# Altium PCB FingMiddle.PcbDoc
Units mil, origin at the board's own origin, x right, y up, seen from the top; angles counter-clockwise.
Board outline 680 x 680 mil, 2 copper layers (Top Layer, Bottom Layer); 7 components, 4 nets, 24 pads, 2 vias.
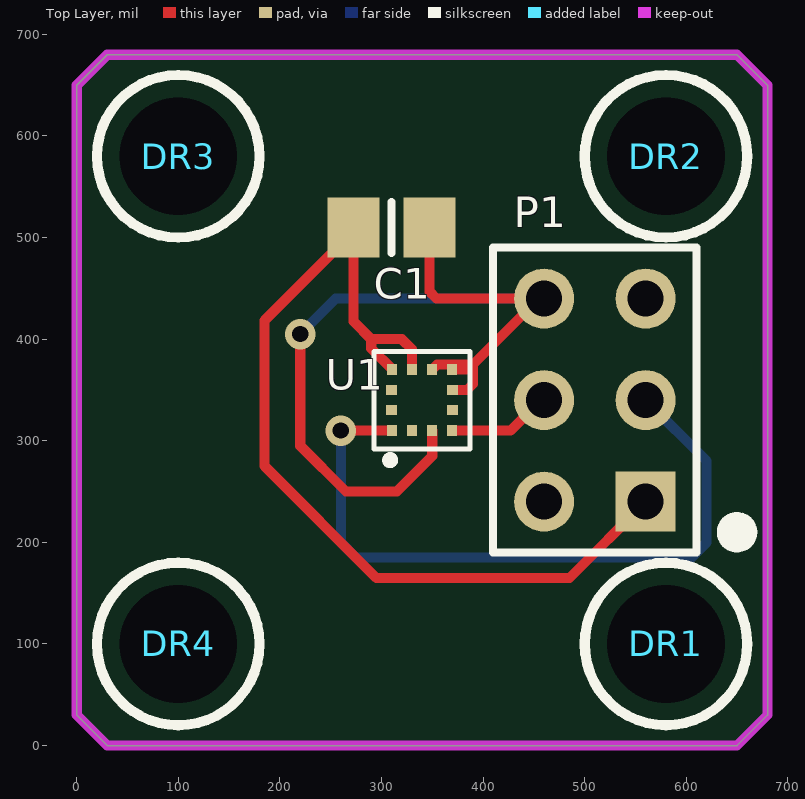
[diagram p0: Top Layer view]
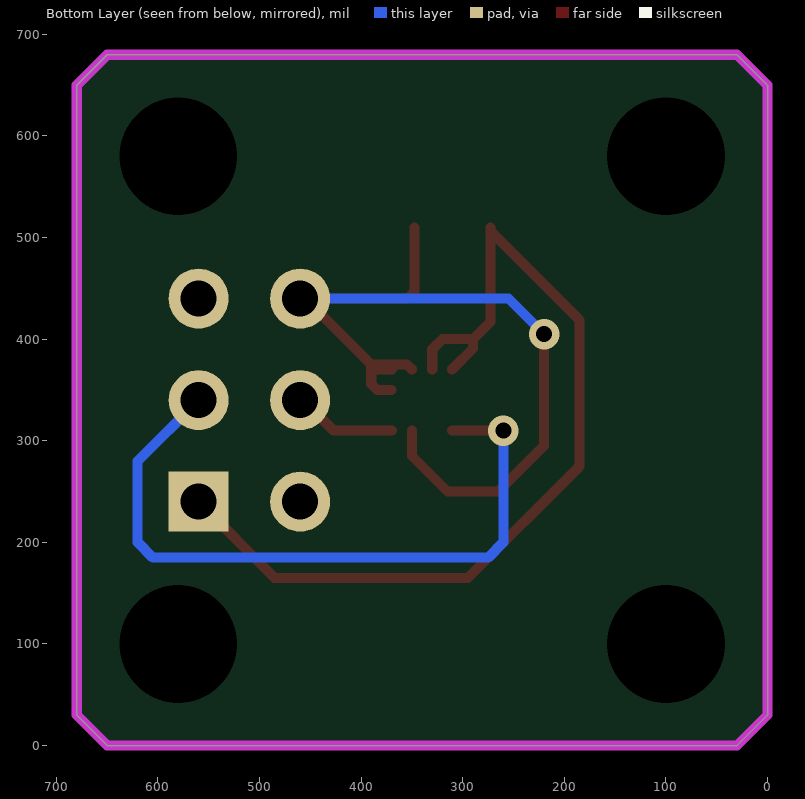
[diagram p1: Bottom Layer view, seen from below]

## Layer stack, top to bottom
Top Solder: solder mask 0.4, Solder Resist, Dk 3.5
Top Layer: signal copper 1.4
Dielectric 1: dielectric 12.6, FR-4, Dk 4.8
Bottom Layer: signal copper 1.4
Bottom Solder: solder mask 0.4, Solder Resist, Dk 3.5

## Board outline
30,0 0,30 0,650 30,680 650,680 680,650 680,30 650,0

## Design rules (kind name [scope] priority, off if disabled: settings)
Clearance "Clearance~Sunstone Circuits" [All] p1: gap=6 ignorepadtopadclearanceinfootprint=FALSE except(0: Arc-Hole Track-Hole SMDPad-Hole THPad-Hole Via-Hole Fill-Hole Poly-Hole Region-Hole Text-Hole) // Sunstone Circuits Minimum Clearance Rule (Double Sided)
HoleSize "HoleSize~Sunstone Circuits" [All] p1: absolutevalues=TRUE maxlimit=251 minlimit=16 maxpercent=80.000 minpercent=20.000 // SSC Hole Size Rule For Single Sided & Double Sided Designs.
HoleSize Testpoint [All] p2: absolutevalues=TRUE maxlimit=100 minlimit=1 maxpercent=80.000 minpercent=20.000
HoleSize TestPointUsage [All] p3: absolutevalues=TRUE maxlimit=100 minlimit=1 maxpercent=80.000 minpercent=20.000
MinimumAnnularRing "MinimumAnnularRing~Sunstone Circuits" [All] p1: minimumring=7 // Sunstone Circuits Minimum Annular Ring (Double Sided)
MinimumSolderMaskSliver [All] p1: minsoldermaskwidth=2
PlaneClearance "PlaneClearance~Sunstone Circuits" [All] p1: clearance=12 // Sunstone Circuits Power Plane Clearance Rule (Double Sided)
PlaneConnect "PlaneConnect~Sunstone Circuits" [All] p1: planeconnectstyle=Relief reliefexpansion=10 reliefentries=4 reliefconductorwidth=8 reliefairgap=10 // Sunstone Circuits Power Plane Connect Rule (Double Sided)
PolygonConnect "PolygonConnect~Sunstone Circuits" [All] p1: connectstyle=Relief reliefconductorwidth=8 reliefentries=4 polygonreliefangle="90 Angle" airgapwidth=10 // Sunstone Circuits Polygon Connect Style (Double Sided)
RoutingVias "RoutingVias~Sunstone Circuits" [All] p1: holewidth=16 width=30 viastyle="Through Hole" minholewidth=16 minwidth=30 maxholewidth=20 maxwidth=40 // Sunstone Circuits Routing Vias Rule (Double Sided)
ShortCircuit "ShortCircuit~Sunstone Circuits" [All] p1: allowed=FALSE // Sunstone Circuits Short Circuit Rule~Do Not Allow (Double Sided)
SilkToSilkClearance [All] p1: silktosilkclearance=1
SilkToSolderMaskClearance [IsPad] p1: minsilkscreentomaskgap=3 clearancetoexposedcopper=TRUE
SolderMaskExpansion "SolderMaskExpansion~Sunstone Circuits" [All] p1: expansion=3 // Sunstone Circuits Solder Mask Expansion Rule (Double Sided)
ViasUnderSMD "ViasUnderSMD~Sunstone Circuits" [All] p1: allowed=FALSE // Sunstone Circuits Vias Under SMD~Do Not Allow (Double Sided)
Width "Width~Sunstone Circuits" [All] p1: maxlimit=100 minlimit=6 preferedwidth=10 // Sunstone Circuits Minimum Width Rule (Double Sided)
23 further rules are at their usual default settings.

## Components (designator, comment, footprint, x,y, rotation, side; value= is the part's Value field where it differs from the comment)
C1 ".1uF" 0805 310,510 r180 top
DR1 "4-40 DRILL HOLE" "4_40 DRILL HOLE" 580,100 r0 top
DR2 "4-40 DRILL HOLE" "4_40 DRILL HOLE" 580,580 r0 top
DR3 "4-40 DRILL HOLE" "4_40 DRILL HOLE" 100,580 r0 top
DR4 "4-40 DRILL HOLE" "4_40 DRILL HOLE" 100,100 r0 top
P1 "90131-0123" HDR2X3 560,240 r90 top
U1 "KX003-1077" *XDCR_KX003-1077 340,340 r90 top

## Footprints (in the part's own frame and the unit in brackets; to place one, negate y for a bottom-side part, rotate by r counter-clockwise, add the part's x,y. Pads: shape width x height; smd on the part's side, far side on the other; paste and mask are expansions set on the pad)
"4_40 DRILL HOLE" [mil]
  round 100 hole 116: 1(0,0)
  silkscreen extent -80,-80 80,80
0805 [mm] "Chip Capacitor; Body 2.0 x 1.2 mm (LxW typ)"
  rect 1.3x1.5 smd: 1(-0.95,0) 2(0.95,0)
  silkscreen extent 0,-0.64 0,0.64, body extent -1,-0.6 1,0.6, height 1.5
*XDCR_KX003-1077 [mm]
  rect 0.275x0.25 smd: 1(-0.763,0.75) 2(-0.763,0.25) 3(-0.763,-0.25) 4(-0.763,-0.75) 7(0.763,-0.75) 8(0.763,-0.25) 9(0.763,0.25) 10(0.763,0.75)
  rect 0.25x0.275 smd: 5(-0.25,-0.763) 6(0.25,-0.763) 11(0.25,0.763) 12(-0.25,0.763)
  silkscreen extent -1.6,-1.2 1.22,1.2
HDR2X3 [mm] "Connector; Header; 3x2 Position"
  rect 1.5x1.5 hole 0.9: 1(0,0)
  round 1.5 hole 0.9: 2(0,2.54) 3(2.54,0) 4(2.54,2.54) 5(5.08,0) 6(5.08,2.54)
  silkscreen extent -1.27,-2.54 6.35,3.81, body extent -1.27,-1.27 6.35,3.81, height 8.42

## Part data
C1: library part CL21A475KPFNNNE, ".1, 10%, 50V", Manufacturer 1=Samsung, Supplier Part Number 1=1276-1259-1-ND, GFUPartNo=CL21A475KPFNNNE, Manufacturer Part Number 1=CL21A475KPFNNNE, PackageReference=0805, Part Type=SMT, Supplier 1=Digi-Key
DR1 DR2 DR3 DR4: library part "4_40 DRILL HOLE", "Mounting hole for 4-40 screw, non-BOM", Manufacturer 1=N/A, GFUPartNo="4_40 DRILL HOLE", Manufacturer Part Number 1=N/A
P1: "MOLEX CONN HEADER 6POS 2ROW .100\" STR TIN", Manufacturer 1=Molex, Supplier Part Number 1=WM8121-ND, GFUPartNo=90131-0123, Manufacturer Part Number 1=90131-0123, Part Type=THRU, Supplier 1=Digi-Key
U1: "Accelerometer X, Y, Z Axis ±2g, 4g, 8g, 16g 3.5kHz _X,Y_, 1.8kHz _Z_ 12-LGA _2x2_", Package="VFLGA-12 Rohm Semiconductor", Digi-Key_Part_Number=KX003-1077CT-ND, Digi-Key_Purchase_URL=https://www.digikey.com/product-detail/en/rohm-semiconductor/KX003-1077/KX003-1077CT-ND/9679234?utm_source=snapeda&utm_medium=aggregator&utm_campaign=symbol, MF="Rohm Semiconductor", MP=KX003-1077, SnapEDA_Link=https://www.snapeda.com/parts/KX003-1077/Rohm/view-part/3603894/?ref=snap

## Via types
v1: diameter 30, hole 16, Top Layer to Bottom Layer, 2 vias

## Nets (pads, with @x,y where several pads share a name; then routed paths per layer and width w, separated by ;. In a path a pad name is that pad's centre, name@x,y a point inside that pad or via, vN(x,y) a via of type N, cw(c..) or ccw(c..) an arc to the next point about the centre after c; other vN are vias at no path point)
3V3: C1.2 P1.1 U1.9 U1.10 | length 939
  Top Layer w10: C1.2 C1.2@272.6,506.06 ; U1.10 310.47,370.35 290,390.83 290,400 ; U1.9 330.02,370.02 330,390 320,400 290,400 ; P1.1 485,165 295,165 185,275 185,418.46 C1.2@272.6,506.06 ; C1.2@272.6,506.06 272.6,417.4 290,400
GND: C1.1 P1.6 U1.3 U1.6 U1.7 U1.8 | length 925.1
  Top Layer w10: v1(220,405) 220,295 265,250 315,250 350,285 350,303.62 349.92,303.7 349.92,309.9 U1.3 ; C1.1 347.4,446.74 354.14,440 455,440 390,375 ; U1.8 349.84,370.35 349.92,370.43 350.26,370.43 354.82,375 390,375 ; U1.7 369.53,370.35 369.61,370.43 385.43,370.43 390,375 ; U1.6 370.02,349.98 384.14,350 390,355.86 390,375
  Bottom Layer w10: v1(220,405) 255,440 P1.6
SCL: P1.3 U1.1 | length 697.8
  Top Layer w10: v1(260,310) U1.1
  Bottom Layer w10: v1(260,310) 260,200 275,185 605,185 620,200 620,280 P1.3
SDA: P1.4 U1.4 | length 102.9
  Top Layer w10: U1.4 427.05,309.98 457.07,340 P1.4
pads on no net: DR1.1 DR2.1 DR3.1 DR4.1 P1.2 P1.5 U1.2 U1.5 U1.11 U1.12

## Keep-outs
Keep-Out Layer:
  the board outline again, w10